# EAGLE board Mighty Esboo-Inari (EAGLE 9.7.0)

Size 167.57 x 127.37 mm. Coordinates in mm from the lower left corner, seen from the top.
Outline: 0,0 167.57,0 167.57,127.37 0,127.37 0,0
Copper layers (1*16): Top 0.035mm / dielectric 1.5mm / Bottom 0.035mm
Design rules "default": minimum track width 6mil, minimum drill 0.35mm, track to track 6mil, track to pad 6mil, pad to pad 6mil, via to via 6mil, smd to smd 6mil, copper to edge 40mil, drill to drill 6mil, minimum pad ring 10mil, minimum via ring 8mil, stop-mask expansion 4mil, vias tented up to drill 0mil, thermal gap 10mil

## Footprints (pad centres in the part's own frame; a part is rotated, then mirrored left to right if it is on the bottom)
LEDRD254W60D565H860B_Y = drill 0.981 pad 1.581: 1 -1.27,0; 2 1.27,0
LEDRD254W60D565H860B_B = drill 0.981 pad 1.581: 1 -1.27,0; 2 1.27,0
LEDRD254W60D565H860B_W = drill 0.981 pad 1.581: 1 -1.27,0; 2 1.27,0
LEDRD254W60D565H860B_O = drill 0.981 pad 1.581: 1 -1.27,0; 2 1.27,0
LEDRD254W60D565H860B = drill 0.981 pad 1.581: 1 -1.27,0; 2 1.27,0
LEDRD254W60D565H860B_G = drill 0.981 pad 1.581: 1 -1.27,0; 2 1.27,0
PIEZO = drill 1 pad 1.6: 1 -3.5,0; 2 3.5,0
RESAD1016W63L850D250B = drill 0.83 pad 1.43: 1 -5.08,0; 2 5.08,0
HA-06-SM065 = drill 1 pad 1.676: 1 -2.54,-2.54; 2 0,2.54; 3 2.54,-2.54
SWITCH-MOMENTARY-PTH-6.5MM = drill 1.016 pad 1.88: 1 -3.251,2.261; 2 3.251,2.261; 3 -3.251,-2.261; 4 3.251,-2.261
ARDUINO-UNO-R3-SHIELD = drill 1.016 pad 1.88: 3.3V 24.13,-2.54; 5V 24.13,0; A0 24.13,12.7; A1 24.13,15.24; A2 24.13,17.78; A3 24.13,20.32; A4 24.13,22.86; A5 24.13,25.4; AREF -24.13,-13.97; D2 -24.13,20.32; D3 -24.13,17.78; D4 -24.13,15.24; D5 -24.13,12.7; D6 -24.13,10.16; D7 -24.13,7.62; D8 -24.13,3.81; D9 -24.13,1.27; D10 -24.13,-1.27; D11 -24.13,-3.81; D12 -24.13,-6.35; D13 -24.13,-8.89; GND@0 24.13,2.54; GND@1 24.13,5.08; GND@2 -24.13,-11.43; IOREF 24.13,-7.62; NC 24.13,-10.16; RES 24.13,-5.08; RX -24.13,25.4; SCL -24.13,-19.05; SDA -24.13,-16.51; TX -24.13,22.86; VIN 24.13,7.62
JHD-162A = drill 1.016 long: 1 -19.05,0; 2 -16.51,0; 3 -13.97,0; 4 -11.43,0; 5 -8.89,0; 6 -6.35,0; 7 -3.81,0; 8 -1.27,0; 9 1.27,0; 10 3.81,0; 11 6.35,0; 12 8.89,0; 13 11.43,0; 14 13.97,0; 15 16.51,0; 16 19.05,0

## Placement (x,y rotation side)
DALMA  YELLOW  [LEDRD254W60D565H860B_Y]  146.27,18.41 180 top
DESPACIO  BLUE  [LEDRD254W60D565H860B_B]  156.43,18.41 180 top
DMENTE  WHITE  [LEDRD254W60D565H860B_W]  161.51,18.41 180 top
DPODER  ORANGE  [LEDRD254W60D565H860B_O]  151.35,18.41 180 top
DREALIDAD  RED  [LEDRD254W60D565H860B]  136.11,18.41 180 top
DTIEMPO  GREEN  [LEDRD254W60D565H860B_G]  141.19,18.41 180 top
PIEZO1  PIEZO  [PIEZO]  28.9,36.84 90 top
R1  220  [RESAD1016W63L850D250B]  145,10.79 90 top
R2  220  [RESAD1016W63L850D250B]  150.08,10.79 90 top
R3  220  [RESAD1016W63L850D250B]  155.16,10.79 90 top
R4  220  [RESAD1016W63L850D250B]  139.92,10.79 90 top
R5  220  [RESAD1016W63L850D250B]  134.84,10.79 90 top
R6  220  [RESAD1016W63L850D250B]  160.24,10.79 90 top
R8  220  [RESAD1016W63L850D250B]  117.58,121.04 0 top
RPOT4  250k  [HA-06-SM065]  96.74,8.26 0 top
S1  SWITCH_MOMENTARY  [SWITCH-MOMENTARY-PTH-6.5MM]  69.72,27.11 90 top
U3  ARDUINO-UNO-R3-SHIELD  [ARDUINO-UNO-R3-SHIELD]  47.88,77.76 270 top
U4  LCD-16X2JHD-162A  [JHD-162A]  111.48,101.03 0 top

## Library data of the parts
DALMA = Tinkercad; CATEGORY: Opto-Electronic; SUB-CATEGORY: LED; VALUE: LED_YELLOW
DESPACIO = Tinkercad; CATEGORY: Opto-Electronic; SUB-CATEGORY: LED; VALUE: LED_BLUE
DMENTE = Tinkercad; CATEGORY: Opto-Electronic; SUB-CATEGORY: LED; VALUE: LED_WHITE
DPODER = Tinkercad; CATEGORY: Opto-Electronic; SUB-CATEGORY: LED; VALUE: LED_ORANGE
DREALIDAD = Tinkercad; CATEGORY: Opto-Electronic; SUB-CATEGORY: LED; VALUE: LED_RED
DTIEMPO = Tinkercad; CATEGORY: Opto-Electronic; SUB-CATEGORY: LED; VALUE: LED_GREEN
PIEZO1 R1-R6 R8 RPOT4 S1 U3 U4 = Tinkercad

## Nets
DALMA_C: DALMA.2 R1.2
DESPACIO_C: DESPACIO.2 R3.2
DMENTE_C: DMENTE.2 R6.2
DPODER_C: DPODER.2 R2.2
DREALIDAD_C: DREALIDAD.2 R5.2
DTIEMPO_C: DTIEMPO.2 R4.2
U3_5V: R8.1 RPOT4.3 U3.5V U4.2
U3_A0: RPOT4.2 U3.A0
U3_A1: S1.4 U3.A1
U3_A2: DMENTE.1 U3.A2
U3_A3: PIEZO1.1 U3.A3
U3_D2: DESPACIO.1 U3.D2
U3_D3: DPODER.1 U3.D3
U3_D4: DALMA.1 U3.D4
U3_D5: DTIEMPO.1 U3.D5
U3_D6: DREALIDAD.1 U3.D6
U3_D7: U3.D7 U4.4
U3_D8: U3.D8 U4.6
U3_D9: U3.D9 U4.11
U3_D10: U3.D10 U4.12
U3_D11: U3.D11 U4.13
U3_D12: U3.D12 U4.14
U3_GND: PIEZO1.2 R1.1 R2.1 R3.1 R4.1 R5.1 R6.1 RPOT4.1 S1.1 U3.GND@0 U3.GND@1 U3.GND@2 U4.1 U4.3 U4.5 U4.16
U4_LED+: R8.2 U4.15

## Tracks (layer width: path | path; a pad name or v marks a point on that pad's centre or on a via)
DALMA_C  (1 unrouted)
DESPACIO_C  (1 unrouted)
DMENTE_C  (1 unrouted)
DPODER_C  (1 unrouted)
DREALIDAD_C  (1 unrouted)
DTIEMPO_C  (1 unrouted)
U3_5V  (3 unrouted)
U3_A0  (1 unrouted)
U3_A1  (1 unrouted)
U3_A2  (1 unrouted)
U3_A3  (1 unrouted)
U3_D2  (1 unrouted)
U3_D3  (1 unrouted)
U3_D4  (1 unrouted)
U3_D5  (1 unrouted)
U3_D6  (1 unrouted)
U3_D7  (1 unrouted)
U3_D8  (1 unrouted)
U3_D9  (1 unrouted)
U3_D10  (1 unrouted)
U3_D11  (1 unrouted)
U3_D12  (1 unrouted)
U3_GND  (15 unrouted)
U4_LED+  (1 unrouted)